# Altium PCB Arduino_DUE_Magic_Pen.PcbDoc (part 2 of 2)
Units mil, origin at the board's own origin, x right, y up, seen from the top; angles counter-clockwise.
Board outline 4416.66 x 2112 mil, 4 copper layers (Top Layer, Mid-Layer 1, Mid-Layer 2, Bottom Layer); 151 components, 188 nets, 610 pads, 191 vias.
Unrouted connection lines stored in the file: 8.
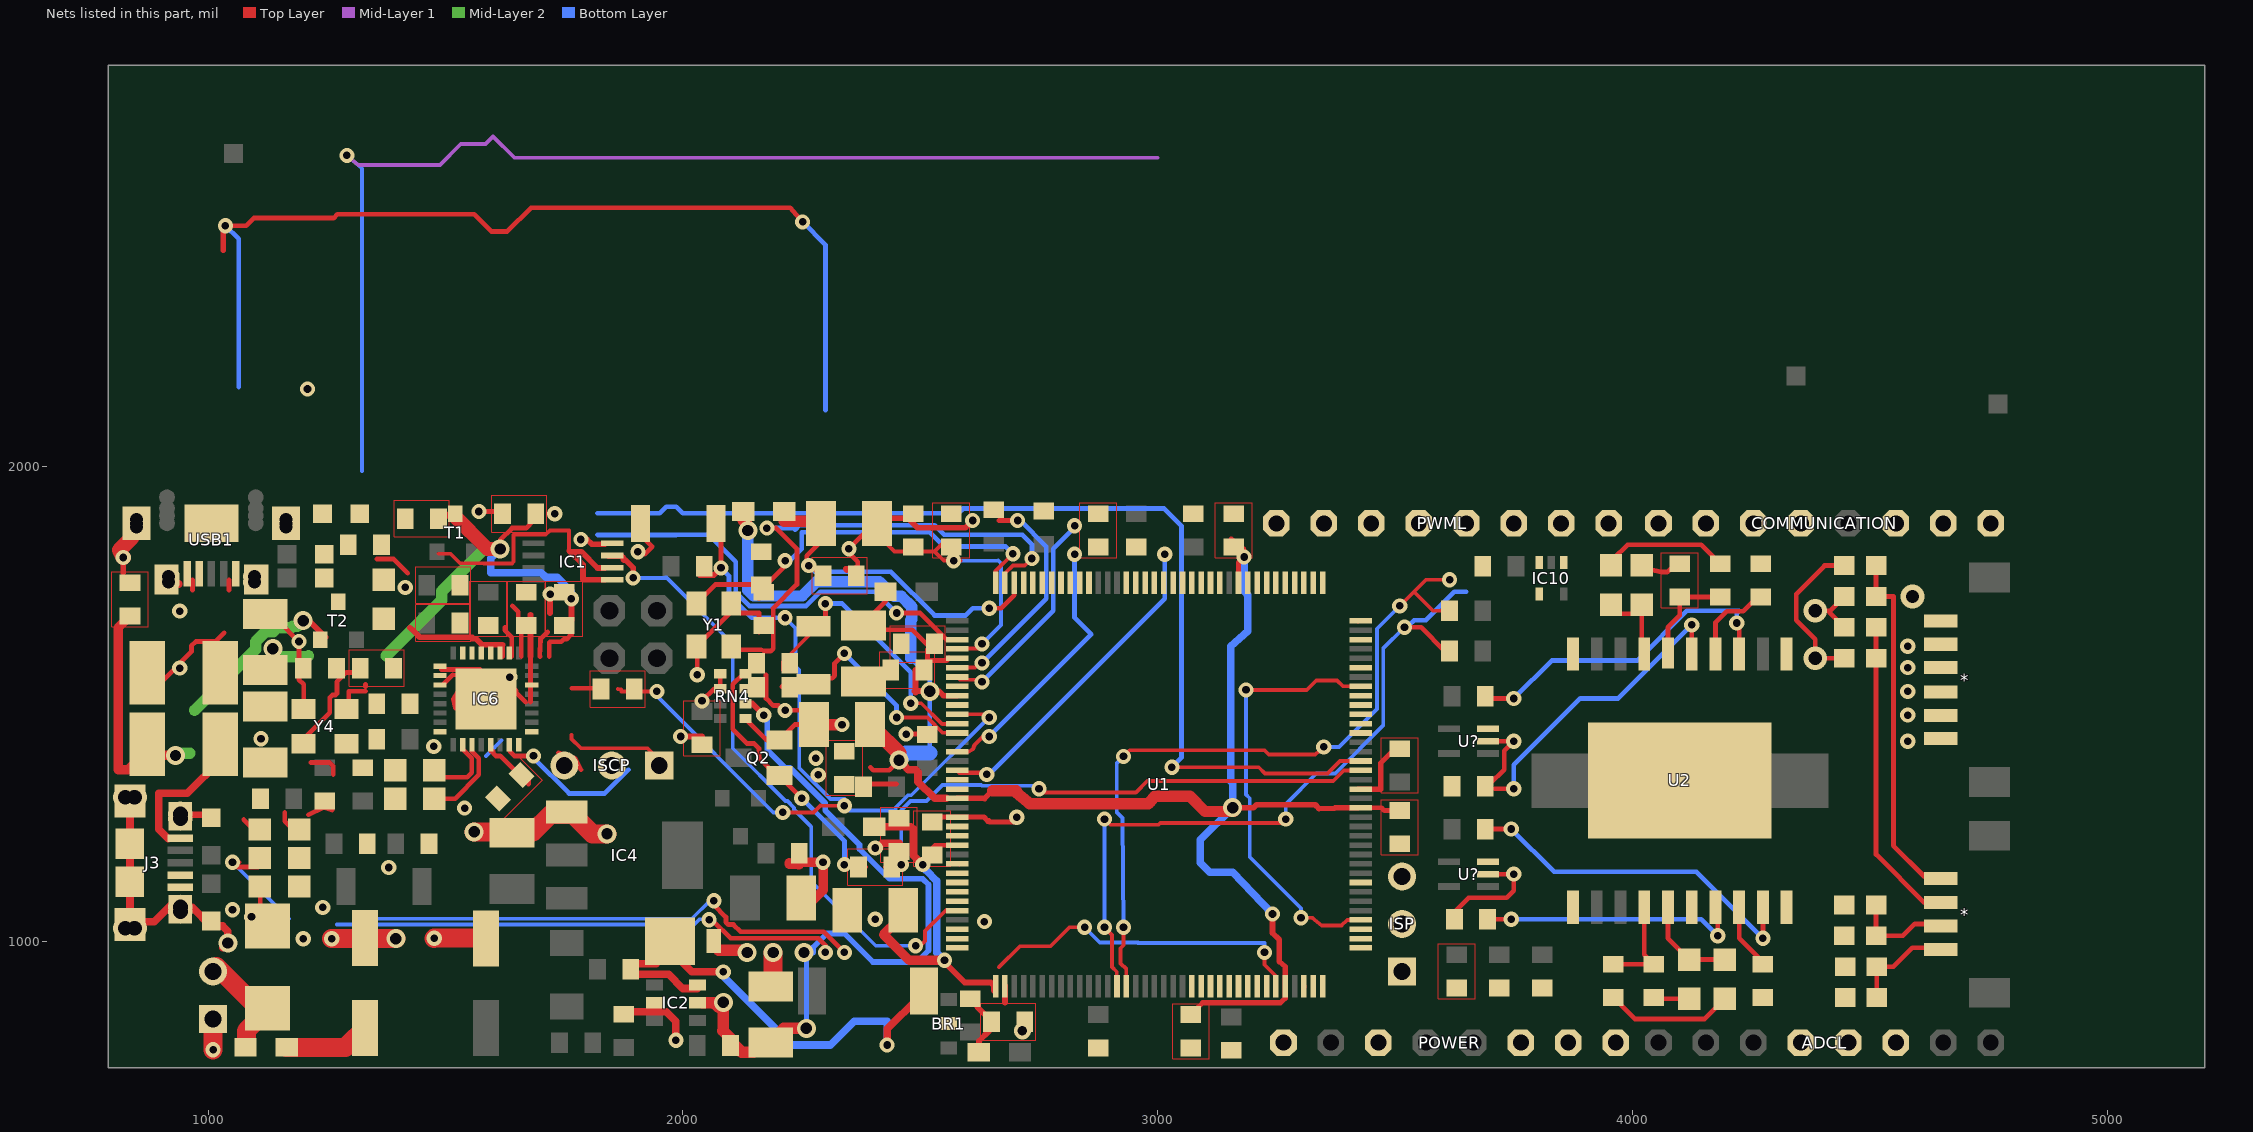
[diagram p4: the nets of this part, all layers, seen from the top]

## Via types
v1: diameter 32, hole 16, Top Layer to Bottom Layer, 160 vias
v2: diameter 40, hole 24, Top Layer to Bottom Layer, 26 vias
v3: diameter 50, hole 28, Top Layer to Bottom Layer, 3 vias
v4: diameter 36, hole 20, Top Layer to Bottom Layer, 1 vias
v5: diameter 32/32/32/32 (per signal layer), hole 16, Top Layer to Bottom Layer, 1 vias

## Nets (pads, with @x,y where several pads share a name; then routed paths per layer and width w, separated by ;. In a path a pad name is that pad's centre, name@x,y a point inside that pad or via, vN(x,y) a via of type N, cw(c..) or ccw(c..) an arc to the next point about the centre after c; other vN are vias at no path point) (continued)
GND: *.6 C1.- C2.- C3.- C4.1 C5.1 C6.1 C7.1 C8.1 C9.1 C10.1 C11.- C12.1 C13.1 C14.1 C15.1 C16.1 C17.1 C18.1 C19.1 C21.1 C22.1 C23.1 C24.1 C25.2 C26.2 C27.- C28.2 C29.- C30.1 C31.1 C32.1 C33.- C34.1 C35.- C36.2 C37.2 C38.2 C39.1 C40.1 C41.- C?.2 COMMUNICATION.6 D1.A D4.P$2 DM2.A DM4.A DM6.A DM8.A IC1.4 IC2.2 IC4.1 IC6.3 IC6.28 IC6.33 IC10.1 IC10.3 J3.P5 J3.P$1 J3.P$2 J3.P$3 J3.P$4 J3.P$5 J3.P$6 J3.P$7 J3.P$8 J3.S1 J3.S2 J3.S3 J3.S4 J3.S5 J3.S6 L.C ON.C P1.1 PC1.- PC2.- POWER.6 POWER.7 Q2.2 R2.2 R7.1 R8.1 R11.2 R18.2 RESET.2 RN4.1 RN4.2 RN4.5 RN4.7 T2.3 U1.12 U1.33 U1.44 U1.46 U1.54 U1.58 U1.74 U1.106 U1.126 U2.P$1 U2.P$10 U2.P$11 U2.P$20 U2.P$21 U?.3 USB1.5 USB1.P$1 USB1.P$2 USB1.P$3 USB1.P$4 USB1.P$5 USB1.P$6 USB1.P$7 USB1.P$8 USB1.P$9 USB1.P$10 USB1.P$11 USB1.S1 USB1.S2 USB1.S3 USB1.S4 Y1.2 Y1.4 Y4.2 Y4.4 Z1.2 Z2.2 Z3.1 Z4.1 Z5.1 | length 4994
  Top Layer w2: 3471.3,1312.01 3494,1312.01 3494.31,1312.31 3504.31,1312.31 3504.61,1312.01 3548.7,1312.01
  Top Layer w8: U1.33@2717.55,1755.2 U1.33@2717.98,1761 ; U1.126@3428.18,1320.16 3429.82,1320.16 U1.126@3429.98,1320
  Top Layer w10: J3.S2@835,1051 J3.P$6@845,1041 ; J3.P$8@928,1083 J3.P$8@941,1083 ; v1(1051,1166) v1@1064.66,1166 ; 1074.66,1256 ON.C@1109.66,1221 ; C27.-@1116,1675.06 1146.94,1675.06 v1(1191,1631) 1191,1551 1201,1541 Y4.4@1201,1496 ; 1520,1491 1516.12,1510.16 IC6.33@1528.44,1528.72 ; IC6.33@1530,1536 1536.76,1530.1 1572.52,1532.53 1643.45,1532.53 1648.98,1527 1648.98,1523 1668.98,1503 ; v1(1570,1905) 1606,1905 R2.2@1620,1891 ; PC2.-@1584.49,1006 PC2.-@1585,1005.49 ; C29.-@1610,1240.06 C29.-@1620.06,1230 ; 1678.82,1503 1678.82,1599.46 ; v1(1905,1820) 1914,1820 1919,1815 1935,1831 RESET.2@1910,1856 ; v1(2030,1561) 2030,1619.3 Y1.2@2028.58,1620.72 2101.42,1693.56 Y1.4@2101.42,1711.28 2121.7,1691 2160,1691 C21.1@2160,1651 ; v1(2040,1506) 2065.75,1531.75 RN4.2@2078.43,1531.75 RN4.1@2078.43,1563.24 ; v2@2130,981 v2(2135,976) ; RN4.5@2131.57,1468.76 2176.93,1423.4 Q2.2@2203.31,1423.4 2235.91,1456 C11.-@2275.94,1456 2245.94,1486 v1(2215,1486) 2210.98,1486 2200.98,1496 2190,1496 2175,1511 2175,1526 ; RN4.7@2131.57,1531.75 2169.25,1531.75 2175,1526 ; C41.-@2170,900.06 C41.-@2190,920.06 ; 2175,1561 2175,1526 ; 2345,1780.02 2341.87,1783.15 2341.87,1785.02 2362.13,1785.02 2367.99,1790.88 2367.99,1799.16 2349.53,1817.62 v1(2349.53,1826.47) C33.-@2384.06,1861 ; C4.1@2380.98,1335.02 2380.98,1331 2450,1331 ; v1(2470,1436) 2505.49,1436 C6.1@2520,1421.49 ; C14.1@2525,1241 2545.1,1261.1 U1.58@2577.78,1261.1 ; DM2.A@4446.54,1596 v3(4385,1596) 4385,1636 4345,1676 4345,1731 4405,1791 DM4.A@4446.54,1791
  Top Layer w11: U1.58@2577.78,1261.1 2633.88,1261.1 2641.98,1253 ; 2643.98,1253 2645.98,1251 v1@2701.98,1251 ; U1.74@2678.18,904.8 U1.74@2678.18,905.8 ; U1.106@3308.1,902.88 U1.106@3308.1,904.8 ; U1.126@3421.98,1320 3429.98,1320 3469.98,1320 3469.98,1374.98 C8.1@3495,1400
  Top Layer w12: 821,1776 v1(821,1808.06) ; 1678.82,1599.46 1678.82,1687.57 ; 1720,1691 v1(1720,1731) ; v1(1785,1846) 1797.98,1846 1807.98,1836 IC1.4@1835,1836 ; v1(1995,1431) C31.1@2040,1431 ; C33.-@2420,1891 2473.38,1891 2493.38,1871 2595,1871 v1(2610,1886) ; 2641.98,1253 2643.98,1253 ; 2678.18,870.2 U1.74@2678.18,905.8
  Top Layer w14: J3.P$2@941,1282 941,1266 999.74,1266 Z3.1@1006,1259.74
  Top Layer w16: J3.S2@835,1051 J3.P$4@835,1311 ; J3.P$6@845,1041 886,1041 J3.P$8@928,1083 ; USB1.P$10@897.69,1749.19 USB1.P$10@937.69,1752.19 ; J3.P$8@941,1078 951,1078 958,1071 966,1071 1005.37,1031.63 1030.37,1031.63 1041,1021 v2(1041,996) v2@1031,986 ; R11.2@1870,851 1965,851 1985,831 v1(1985,791) ; v1@2415,1201 2420,1206 C10.1@2455,1206
  Top Layer w20: 2223.48,1165 2223.97,1164.51 2223.97,1161.98 2241.7,1161.98 2242.7,1160.98 2245.18,1160.98 2240.16,1166 v1(2295,1166) ; C1.-@2249.04,1061 2295,1106.96 v1(2295,1166) ; v1@2290,1166 v1(2295,1166)
  Top Layer w24: D4.P$2@2075,981 v2@2130,981 ; C11.-@2275.94,1456 v1(2335,1456)
  Top Layer w32: v1(821,1808.06) 812.65,1824.03 838.98,1850.36 USB1.P$5@838.98,1856
  Top Layer w40: P1.1@1000,836 1010,826 v1(1010,771) ; v1(1260,1005) v2(1395,1005) ; v1@1475,1005 v1(1476,1006) ; v1@1480,1006 PC2.-@1584.49,1006 ; v2(1560,1230) 1684,1230 1721,1267 1768,1267 1809,1226 v2(1840,1226) ; C41.-@2190,920.06 v2(2190,976)
  other v1: 1200,1005 2405,1046 2405,1196 2702.98,1261 1540,1280 2285,1350 4580,1421 1111,1426 1635,1556 1415,1745
  other v4: 2715,811
JTAG_TCK: U1.28
JTAG_TDI: U1.29
JTAG_TDO: U1.30 | length 12.3
  Top Layer w8: U1.30@2776.6,1755.2 2775.98,1753.82 2775.98,1745 U1.30@2777.98,1745
JTAG_TMS: U1.31 | length 6.8
  Top Layer w8: U1.31@2756.92,1755.2 U1.31@2756.98,1762
L13: IC1.1 IC1.2 RN3C.1 | length 596.9
  Top Layer w8: 1485,1816 1510,1816 1530,1796 1580.4,1796 1580.9,1795.5 1639.5,1795.5 1643,1799 1643,1856 1711.06,1856 1720.06,1865 1760,1865 1760,1836.35 1760.01,1822.31 1760.15,1822.17
  Top Layer w12: IC1.1@1835,1761 1790,1761 1789.31,1761.69 1789.31,1793.01 1760.15,1822.17 1762.32,1820 1786,1820 1820,1786 IC1.2@1835,1786
M1_EN: RM2.1
M1_IN: RM1.1 U?.2@3696,1141 | length 243.2
  Top Layer w10: RM1.1@3617.5,1053.5 3655,1091 3735,1091 3750,1106 v1(3750,1141) U?.2@3696,1141
M2_EN: RM5.1
M2_IN: RM4.1 U?.2@3696,1421 | length 164.7
  Top Layer w10: U?.2@3696,1421 v1(3750,1421) 3730,1401 3730,1361 3700,1331
M_OUT1: R?.2@3960,951 R?.2@4045,951 U2.P$4 | length 218.3
  Top Layer w10: R?.2@3955,951 R?.2@3960,951 R?.2@4045,951 4025,971 U2.P$4@4025,1071
M_OUT2: L1.C L2.A U2.P$5 | length 203.6
  Top Layer w10: U2.P$5@4075,1071 4075,1006 L2.A@4120,961 L1.C@4195,961
M_OUT3: R?.2@4100,1725 R?.2@4185,1725 U2.P$16 | length 194.4
  Top Layer w10: U2.P$16@4075,1626 4075,1661 4100,1686 R?.2@4100,1725 R?.2@4185,1725
M_OUT4: L3.C L4.A U2.P$17 | length 151.7
  Top Layer w10: L4.A@3955,1689.66 4020,1689.66 4020,1610 U2.P$17@4025,1605
MASTER-RESET: C20.1 POWER.3 R23.2 RESET.1 U1.47 | length 1852.7
  Top Layer w8: 1862.5,1531 1869.88,1529.94 ; 1869.88,1526 v1(1945,1526) ; v1(2210,1271) 2275,1271 2289.5,1285.5 2290,1285 v1(2340,1285) ; U1.47@2577.78,1477.64 2634.62,1477.64 2641.26,1471 v1(2645,1471)
  Top Layer w10: RESET.1@2070,1856 2080,1846 v1(2080,1786)
  Top Layer w12: C20.1@2035,1771 2065,1771 v1(2080,1786)
  Bottom Layer w8: v1(1945,1526) 1945,1516 2190,1271 v1(2210,1271) ; v1(2215,1681) 2236.98,1659.02 2236.98,1579.02 2245,1571 2245,1364.8 2310.77,1299.03 2340,1299.03 v1(2340,1285) 2340,1286 2351,1275 2448,1275 2448,1280.97 2474.03,1307 2481,1307 v1(2645,1471)
  Bottom Layer w10: v1(2080,1786) 2097,1769 2097,1729 2145,1681 v1(2215,1681)
MISO: ISP.1 U1.108
MISO2: IC6.17 ISCP.1 | length 246.9
  Top Layer w8: 1765.44,1434.1 1765.44,1425.56 1785,1406 1925,1406 ISCP.1@1975,1356
MOSI: ISP.3 U1.109 | length 1.9
  Top Layer w8: U1.109@3428.18,985.51 U1.109@3429.98,985
MOSI2: IC6.16 ISCP.3 | length 63.8
  Top Layer w10: ISCP.3@1737.88,1396.54 1772.58,1385.31 1785,1361
N$1: IC6.26 R21.1 | length 83.2
  Top Layer w10: 1718.19,1599.46 1718.19,1628.7 1720,1630.51 1743.16,1630.51 1748.65,1636 1755,1636 1765,1646
Net*_1: *.1@4650,1132.18 DM3.A DM4.C | length 743.5
  Top Layer w10: DM4.C@4513.46,1791 DM3.A@4513.46,1726 4550,1726 4550,1201 4615,1136 *.1@4640,1136
Net*_2: *.2@4650,1081 DM1.A DM2.C | length 657.1
  Top Layer w10: DM1.A@4513.46,1661 DM2.C@4513.46,1596 4513.46,1182.54 4615,1081 *.2@4650,1081
Net*_3: *.3@4650,1031.79 DM7.A DM8.C | length 186.9
  Top Layer w10: DM7.A@4513.46,1076 DM8.C@4513.46,1011 4570,1011 4595,1036 *.3@4625,1036
Net*_4: *.4@4650,982.57 DM5.A DM6.C | length 206.6
  Top Layer w10: DM5.A@4515,881 DM6.C@4515,946 4550,946 4590,986 *.4@4640,986
NetBR1_2: BR1.2 C34.2 JR1.2 L3.1 | length 109
  Top Layer w12: JR1.2@2620,861 2640,841 2640,816 C34.2@2638.75,817.25 ; L3.1@2623.38,766 2623.38,789.38 C34.2@2645,811
NetIC6_13: IC6.13 R18.1 | length 125.5
  Top Layer w10: IC6.13@1595,1400 1600.02,1400 1600.02,1396.03 1606.05,1390 1615,1390 1674.75,1330.25 R18.1@1674.75,1344.75
NetJ3_P4: J3.P4
NetL1_A: L1.A R?.1@3960,881 | length 264.1
  Top Layer w10: R?.1@3965,876 4005,836 4152.68,836 L1.A@4195,878.32
NetL2_C: L2.C R?.1@4045,881 | length 87.3
  Top Layer w10: R?.1@4032.68,878.32 L2.C@4120,878.32
NetL3_A: L3.A R?.1@4100,1795 | length 92.1
  Top Layer w10: L3.A@4020,1777.34 4027.55,1784.89 4061.3,1777.34 4073.29,1777.34 4092.61,1796.65 R?.1@4100,1795
NetL4_C: L4.C R?.1@4185,1795 | length 269
  Top Layer w10: L4.C@3960,1805 3990,1835 4145,1835 R?.1@4185,1795 ; R?.1@4170,1786 R?.1@4185,1786
NetL_A: L.A RN3C.2 | length 77.4
  Top Layer w10: 1355,1805 1390,1805 1420,1775
NetON_A: ON.A RN3D.2 | length 63
  Top Layer w10: 1161,1271 1161,1252.34 ON.A@1192.34,1221
NetPOWER_1: POWER.1
NetQ2_1: Q2.1 R3.2 RN4.8 | length 528.9
  Top Layer w10: RN4.8@2131.57,1563.24 2127.69,1563.24 2105,1540.55 2105,1446 2135,1416 2150,1416 2160,1406 2160,1386 2197.4,1348.6 Q2.1@2202.4,1348.6 ; Q2.1@2200,1351 Q2.1@2202.4,1348.6 ; Q2.1@2203.31,1348.6 Q2.1@2202.4,1348.6 ; v1(2250,1301) Q2.1@2202.4,1348.6
  Bottom Layer w10: v1(2250,1301) 2340,1211 v1(2340,1161)
NetR4_1: R4.1 U1.53 | length 688
  Top Layer w10: U1.53@2577.78,1359.53 2582.56,1354.75 2636.25,1354.75 v1(2640,1351)
  Bottom Layer w10: v1(2640,1351) 2645,1351 3015,1721 v1(3015,1815)
NetR5_2: R5.2 U1.43 | length 455.2
  Top Layer w8: U1.43@2577.78,1556.38 2583.56,1550.6 2625.4,1550.6 v1(2630,1546)
  Bottom Layer w10: v1(2630,1546) 2780,1696 2780,1826 v1@2820,1866
  other v1: 2825,1875
NetR6_2: R6.2 U1.42 | length 469.8
  Top Layer w8: U1.42@2576,1576 2615,1576 v1@2620,1581
  Top Layer w10: 2665,1886 v1(2705,1886)
  Bottom Layer w10: v1(2630,1586) 2765,1721 2765,1831 2710,1886 v1(2705,1886)
NetR8_2: R8.2 U1.51 | length 558.4
  Top Layer w8: U1.51@2590,1401 2599,1398 2611,1404 2614,1413 2632,1431 v1(2645,1431)
  Bottom Layer w10: v1(2645,1431) 2860,1646 2825,1681 v1(2825,1815)
NetR14_2: R14.2 TX1.A | length 54.8
  Top Layer w10: 1211,1266 1243,1282 1261,1276
NetR15_2: R15.2 RX1.A | length 68
  Top Layer w10: 1216,1376 1256,1376 1263.32,1368.68 1263.32,1351
NetRM1_2: RM1.2 U2.P$7 | length 561.6
  Top Layer w10: RM1.2@3695,1046 v1(3745,1046) ; U2.P$7@4175,1071 4180,1066 v1(4180,1011)
  Bottom Layer w10: v1(3745,1046) 4145,1046 v1(4180,1011)
NetRM2_2: RM2.2 U2.P$8 | length 121.6
  Top Layer w10: U2.P$8@4225,1071 4225,1006 RM2.2@4265,966
NetRM3_2: RM3.2 U2.P$9 | length 740.3
  Top Layer w10: RM3.2@3695,1236 v1(3745,1236) ; v1(4275,1006) U2.P$9@4275,1071
  Bottom Layer w10: v1(3745,1236) 3835,1146 4135,1146 v1(4275,1006)
NetRM4_2: RM4.2 U2.P$15 | length 648.3
  Top Layer w10: 3709.9,1321.1 3710,1321 v1(3750,1321) ; U2.P$15@4125,1605 v1(4125,1666)
  Bottom Layer w10: v1(3750,1321) 3750,1371 3890,1511 3970,1511 v1(4125,1666)
NetRM5_2: RM5.2 U2.P$14 | length 158.6
  Top Layer w10: U2.P$14@4175,1626 4175,1671 4199,1695 4233.29,1695 4254.29,1716 RM5.2@4270,1716
NetRM6_2: RM6.2 U2.P$13 | length 696.8
  Top Layer w10: RM6.2@3700,1511 v1(3750,1511) ; v1(4220,1670) 4225,1665 U2.P$13@4225,1605
  Bottom Layer w10: v1(3750,1511) 3830,1591 4010,1591 4115,1696 4225,1696 4220,1691 v1(4220,1670)
NetRN3A_2: RN3A.2 RX.A
NetRN3B_2: RN3B.2 TX.A
  other v1: 1241,1071
  other v5: 1380,1155
PIN22: ADCL.4 U1.1
PIN23: ADCL.5 U1.7
PIN24: ADCL.6 U1.8
PIN25: U1.13 | length 4.8
  Top Layer w8: U1.13@3110.98,1760 U1.13@3111.25,1755.2
PIN26: U1.14
PIN27: U1.15 | length 0.3
  Top Layer w8: U1.15@3071.88,1754.9 U1.15@3071.88,1755.2
PIN28: U1.16 | length 2
  Top Layer w8: U1.16@3051.98,1753.2 U1.16@3052.19,1755.2
PIN29: U1.19
PIN30: U1.22
PIN31: U1.26 | length 10.8
  Top Layer w8: U1.26@2854.98,1766 U1.26@2855.34,1755.2
PIN32: U1.32
PIN33: U1.55 | length 4.3
  Top Layer w8: U1.55@2577.78,1320.16 U1.55@2581.98,1321
PIN34: U1.59 | length 4.2
  Top Layer w8: U1.59@2577.78,1241.42 U1.59@2581.98,1241
PIN35: U1.60
PIN36: U1.116 | length 4.3
  Top Layer w8: U1.116@3428.18,1123.31 3428.18,1122.8 U1.116@3431.98,1123
PIN37: U1.63 | length 4.5
  Top Layer w8: U1.63@2577.78,1162.68 U1.63@2581.98,1161
PIN38: U1.64
PIN39: U1.65
PIN40: U1.66
PIN41: U1.67
PIN42: U1.71
PIN43: U1.72 | length 3.8
  Top Layer w8: U1.72@2573.98,985 U1.72@2577.78,985.51
PIN44: U1.101
PIN45: U1.100 | length 0.2
  Top Layer w8: U1.100@3189.99,904.8 U1.100@3189.98,905
PIN46: U1.99
PIN47: U1.98 | length 0.7
  Top Layer w8: U1.98@3149.98,905 U1.98@3150.62,904.8
PIN48: U1.97
PIN49: U1.96 | length 7.9
  Top Layer w8: U1.96@3109.98,897 U1.96@3111.25,904.8
PIN50: U1.95
PIN51: U1.94 | length 1.7
  Top Layer w8: U1.94@3070.18,904.8 U1.94@3071.88,904.8
PWM2: *.2@4650,1625.21 PWML.3 U1.144 | length 6.4
  Top Layer w8: U1.144@3421.98,1673 U1.144@3428.18,1674.49
  other v1: 4580,1621
PWM3: *.3@4650,1576 PWML.4 U1.139 | length 6.3
  Top Layer w8: U1.139@3421.98,1577 U1.139@3428.18,1576.06
  other v1: 4580,1576
PWM4: *.4@4650,1524.82
  other v1: 4580,1526
PWM5: *.5@4650,1475.61 PWML.6 U1.136
  other v1: 4580,1476
PWM6: PWML.7 U1.135 | length 6.2
  Top Layer w8: U1.135@3421.98,1497 U1.135@3428.18,1497.32
PWM7: PWML.8 U1.134 | length 2.5
  Top Layer w8: U1.134@3425.98,1477 3426.62,1477.64 U1.134@3428.18,1477.64
PWM8: U1.133 | length 6.3
  Top Layer w8: U1.133@3421.98,1457 U1.133@3428.18,1457.95
PWM9: U1.132 | length 14.2
  Top Layer w8: U1.132@3413.98,1438 3417.71,1438.27 U1.132@3428.18,1438.27
PWM11: U1.20
PWM12: U1.21
PWM13: IC1.3 U1.68 | length 1310.2
  Top Layer w8: v1(2490,990) 2500,990 2510,1000 2510,1021 U1.68@2555,1066
  Top Layer w12: IC1.3@1843.19,1811 1870.61,1811 1874,1807.61 1874,1804.23 1875.72,1802.51 1879.1,1802.51 1895,1786.61 v1(1895,1765)
  Bottom Layer w8: v1(1895,1765) 1962.78,1765 1964.39,1766.61 2105,1626 2105,1406 2216,1295 2219.94,1295 2234,1280.94 2234,1277 2270,1241 2270,1126 2406,990 v1(2490,990)
  other v1: 2280,1385
RD+: IC6.29 R20.1 | length 114.3
  Top Layer w10: 1640.49,1706 1652.99,1693.5 1652.99,1662.99 1659.14,1656.84 1659.14,1599.46
RD-: IC6.30 R19.1 | length 184.1
  Top Layer w2: 1437.01,1631.3 1440.6,1631.3 1441.3,1632 1458.7,1632 1459.4,1631.3 1552.99,1631.3
  Top Layer w10: 1625,1661 1625,1654.98 1639.45,1640.53 1639.45,1599.46
RESET_CMD: IC6.22 R23.1 | length 74.7
  Top Layer w10: 1765.44,1532.53 1817.86,1532.53 R23.1@1839.48,1527
RX: IC10.4 PWML.1 U1.27
RXD0: COMMUNICATION.2 U1.18
RXD1: U1.5
RXD2: U1.3
RXL: RX.C U1.103 | length 1993.8
  Top Layer w8: 2665.98,945 2709.98,989 2773.98,989 2813.98,1029 v1(2845.98,1029) ; v1(3225,976) 3225,950 3249.04,925.96 U1.103@3249.04,904.8
  Top Layer w10: 1061,1156 1104.66,1156 RX.C@1109.66,1161 ; v1(2065,1085) 2065,1076 2090.44,1050.56 2090.44,1040.03 2095.72,1034.76 2106.24,1034.76 2121.24,1019.76 2296.24,1019.76 v1(2340,976)
  Bottom Layer w8: 1061,1156 1170,1047 ; 1334,1047 2018.56,1047 2056.56,1085 v1(2065,1085) ; v1(2845.98,1029) 2877.98,997 2958.98,997 2957.98,996 3225,996 v1(3225,976)
  other v1: 1051,1066
RXL-U2: IC6.10 RX1.C | length 140.6
  Top Layer w10: RX1.C@1485,1345 1545,1345 1555,1355 1555,1385 1535.79,1404.21 IC6.10@1535.79,1413.54
SCK2: IC6.15 ISCP.2 | length 309.9
  Top Layer w10: IC6.15@1635,1400 1645,1390 v1(1685,1390)
  Bottom Layer w10: v1(1685,1390) 1685,1386 1760,1311 1835,1311 1885,1361
SCL0-3: COMMUNICATION.8 RN5B.2 U1.87 | length 1536
  Top Layer w8: v1(2927.98,1029) 2927.98,991 2921.98,985 2921.98,953 2933.98,941 2933.98,905 U1.87@2934.08,904.8 ; v1(2927.98,1389) 2940.98,1402 3224.98,1402 3233.98,1393 3331.98,1393 v1(3349.98,1409) ; v1(3510,1706) 3540,1736 ; RN5B.2@3610,1696 3580,1696 3540,1736 ; v1(3615,1761) 3565,1761 3540,1736
  Bottom Layer w8: v1(2927.98,1029) 2925.98,1259 2913.98,1271 2913.98,1375 v1(2927.98,1389) ; v1(3349.98,1409) 3381.98,1409 3461.98,1489 3461.98,1657.98 v1(3510,1706)
SCL1: COMMUNICATION.3 U1.70 | length 4
  Top Layer w8: U1.70@2573.98,1025 U1.70@2577.78,1024.88 U1.70@2577.66,1025
  other v1: 2635,1041
SDA0-3: COMMUNICATION.7 RN5A.1 U1.86 | length 1545.4
  Top Layer w8: v1(2887.98,1029) 2903.98,1013 2903.98,945 2913.78,935.2 U1.86@2913.78,908.8 ; v1(2887.98,1257) 2899.98,1245 3001.98,1245 3005.98,1249 3261.98,1249 v1(3269.98,1257) ; U1.86@2914.4,904.8 U1.86@2913.78,908.8 ; U1.86@2915.98,905 U1.86@2913.78,908.8
  Top Layer w10: v1@3525.57,1661 3555,1661 RN5A.1@3605,1611
  Bottom Layer w8: v1(2887.98,1029) v1(2887.98,1257) ; v1(3269.98,1257) 3269.98,1289 3333.98,1353 3373.98,1353 3475,1454.02 3475,1616 v1(3520,1661)
  Bottom Layer w10: v1@3514,1661 v1(3520,1661) ; v1@3530,1666 3540,1676 3565,1676 3625,1736 3650,1736
SDA1: COMMUNICATION.4 U1.9 | length 2.2
  Top Layer w8: U1.9@3189.98,1753 U1.9@3189.99,1755.2
SPCK: ISP.2 U1.110
SS0/PWM10: U1.102 U1.111 | length 6.9
  Top Layer w8: U1.102@3229.36,904.8 U1.102@3229.98,905 ; U1.111@3421.98,1025 U1.111@3428.18,1024.88
SS1/PWM4: PWML.5 U1.112 U1.137 | length 919.9
  Top Layer w8: v1(3185.98,1529) 3313.98,1529 3333.98,1549 3377.98,1549 3389.98,1537 3421.98,1537 U1.137@3428.18,1536.69 ; v1(3301.98,1049) 3325.98,1049 3345.98,1033 3386.98,1033 3399.41,1044.57 U1.112@3428.18,1044.57
  Bottom Layer w8: v1(3185.98,1529) 3185.98,1309 3193.98,1301 3193.98,1177 3301.98,1069 v1(3301.98,1049)
SS3: U1.142
SW: C42.2 D4.P$1 IC2.6 L4.P$1 | length 985.5
  Top Layer w10: D4.P$1@1943.78,952.3 D4.P$1@1972.48,981
  Top Layer w16: C42.2@1890,941 1901.3,952.3 D4.P$1@1943.78,952.3 ; C42.2@1900,930 1970,930 2000,900 IC2.6@2030.28,900 ; D4.P$1@1972.48,981 2018.48,935 v1(2085,935) ; v1(2430,781) 2430,814.78 L4.P$1@2496.22,881
  Bottom Layer w16: v1(2085,935) 2085,926 2230,781 2310.4,781 2360.4,831 2430,831 v1(2430,781)
TX: IC6.8 PWML.2 U1.2 | length 2484.9
  Mid-Layer 1 w8: v1(1291.98,2655) 1315.98,2635 1487.98,2635 1531.98,2679 1583.98,2679 1599.98,2695 1644.98,2650 3000,2650
  Bottom Layer w8: v1(1291.98,2655) 1323.98,2627 1323.98,1990 ; 1585,1390 1590,1395 1618,1423
  other v1: 1475,1410
TXD0: COMMUNICATION.1 U1.17
TXD1: U1.6
TXD2: U1.4
TXL: TX.C U1.107 | length 1153.7
  Top Layer w10: v1(1091,1051) 1109.66,1069.66 TX.C@1109.66,1101 ; v1(2055,1045) 2061,1045 2065,1041 2100.24,1005.76 2285.24,1005.76 2300,991 v1(2300,976)
  Bottom Layer w8: v1(1091,1051) 1107,1035 ; 1271,1035 2023.53,1035 2034.53,1046 2055,1046 2056,1045 v1(2055,1045)
TXL-U2: IC6.11 TX1.C | length 161.8
  Top Layer w10: TX1.C@1485,1300 1519.8,1300 1570,1350.2 1570,1385 IC6.11@1555,1400
UOTGID: U1.129 USB1.4 Z5.2 | length 4310.6
  Top Layer w8: v1(3030,1366) 3212.98,1366 3225.98,1353 3357.98,1353 3384.19,1379.21 U1.129@3428.18,1379.21
  Top Layer w10: 966.59,1739.41 966.59,1761 ; v1(1035.98,2507) 1079.98,2507 1095.98,2523 1263.98,2523 1271.98,2531 1559.98,2531 1595.98,2495 1629.98,2495 1679.98,2545 2225.98,2545 v1(2251.98,2515)
  Top Layer w12: 1031.35,2455 1031.35,2502.37 v1(1035.98,2507)
  Bottom Layer w10: v1(1035.98,2507) 1063.98,2479 1063.98,2167 ; 1820,1901 1950.64,1901 1964.64,1915 1985.36,1915 1999.36,1901 2580,1901 2590,1911 3014,1911 3050,1875 3050,1386 v1(3030,1366) ; v1(2251.98,2515) 2300,2466.98 2300,2119
  other v1: 940,1695 1208.98,2163
UOTGVBOF: R3.1 U1.128 | length 1199.7
  Top Layer w8: R3.1@2425.49,1156 2430.49,1161 v1(2460,1161) ; v1(2750,1321) 2758,1313 2953.98,1313 2977.98,1337 3369.98,1337 3391.98,1359 3419.98,1359 U1.128@3428.18,1359.53
  Top Layer w10: 2355,1156 2385,1156
  Bottom Layer w8: v1(2460,1161) 2460,1276 2479,1295 2512.98,1295 2546.98,1329 2628.06,1329 2630.06,1327 2747.98,1327 2750,1324.98 v1(2750,1321)
USBVCC: C27.+ C35.+ F1.1 R2.1 R21.2 T1.1 | length 969.9
  Top Layer w10: v2(1615,1826) 1615,1845 1640,1870 1670,1870 R2.1@1685,1885
  Top Layer w12: 1765,1676 v1(1765,1721)
  Top Layer w30: T1.1@1517,1897 1588,1826 v2(1615,1826)
  Mid-Layer 2 w10: v2(1136,1616) 1151,1601
  Mid-Layer 2 w24: 1151,1601 1153,1599 1209,1599 1211,1601 ; 1375,1601 1492,1718 1492,1736.75 1581.25,1826 v2(1615,1826)
  Bottom Layer w16: v2(1615,1826) 1595,1806 1595,1776 1701.4,1776 1711.4,1766 1735,1766 1765,1736 v1(1765,1721)
  Bottom Layer w30: v2@1610,1826 v2(1615,1826)
USBVCCU2: C28.1 F2.1 IC6.31 T2.1 | length 1135.8
  Top Layer w10: 1619.77,1599.46 1619.77,1624.21
  Top Layer w12: v2(1200,1675) 1200,1687 1247,1640 ; 1425,1660 1428,1657 1429.11,1657 1442.01,1644.1 1442.01,1642.99 1445,1640 1555.77,1640 1555.77,1637 1563.75,1637 1576.54,1624.21 1619.77,1624.21
  Top Layer w20: C28.1@835,1685 810,1660 810,1361 831,1361 866,1396 871,1391 v2(931,1391)
  Mid-Layer 2 w24: v2(931,1391) 936,1396 961,1396 ; 971,1486 1100,1615 1100,1630.91 1121.09,1652 1137,1652 1145,1660 1174.75,1660 1177.75,1663 1188,1663 v2(1200,1675)
VBG: C25.1 R7.2 U1.40 | length 559.6
  Top Layer w8: 2430,1836 2445.49,1820.51 2530,1820.51 ; C25.1@2565,1838.5 2547.5,1838.5 2530,1821 2550,1801 v1@2585,1801 ; U1.40@2577.78,1615.43 2582.98,1616 2622.98,1616 2630,1623.02 v1(2630,1626)
  Bottom Layer w8: v1(2570,1801) 2662.98,1801 2663.99,1802.01 2670,1796 2670,1666 v1(2630,1626)
VCC: *.1@4650,1674.43
  other v3: 4590,1726
VDDANA: C3.+ C10.2 L1.2 U1.73 | length 742
  Top Layer w8: U1.73@2657.49,896 U1.73@2658.49,904.8
  Top Layer w12: v1@2546.4,959.6 v1(2551,959.6) ; v1@2548.7,957.3 2593.51,912.49 2648.26,912.49 2654.7,906.05 2654.7,896 U1.73@2657.49,896
  Top Layer w16: L1.2@2405,1251 2415,1241 2480,1241 2485,1236 2485,1181 v1(2505,1161)
  Top Layer w20: C3.+@2462.5,1043.5 2452.5,1043.5 2422.5,1013.5 2476.4,959.6 v1(2551,959.6)
  Bottom Layer w16: v1@2504.98,1156 2511.98,1149 2512.46,1149 2535,1126.46 2535,975.6 v1(2551,959.6)
VDDOUT: C11.+ C12.2 C13.2 C14.2 C15.2 C16.2 C17.2 L5.1 U1.10 U1.45 U1.56 U1.61 U1.104 U1.124 | length 3796.5
  Top Layer w8: U1.124@3421.98,1281 U1.124@3428.18,1280.79
  Top Layer w10: 2395,1366 2400.98,1360.02 2434.02,1360.02 v2(2455,1381) ; C14.2@2525,1196 2531.05,1202.05 U1.61@2577.78,1202.05 ; U1.124@3428.18,1280.79 3471.78,1280.79 3477.57,1275 C17.2@3510,1275
  Top Layer w11: C16.2@3080,855 3095,870 3259,870 3268.73,879.73 U1.104@3268.73,904.8 3268.73,946.25 3255.98,957 ; U1.10@3170.3,1755.2 3170.3,1797.32 v1(3181.98,1809) ; 3339.98,1279 3371.98,1279 3373.98,1281 U1.124@3421.98,1281
  Top Layer w11.5: U1.56@2577.78,1300.47 2635.45,1300.47
  Top Layer w12: 2487.5,1526 v2(2520,1526) 2540,1526 2548.99,1517.01 U1.45@2577.78,1517.01 ; 2490,1523.5 C15.2@2490,1571 ; 2635.45,1300.47 2651.98,1317 ; C13.2@3155,1846 C13.2@3181.54,1823.84 ; v2(3157.98,1281) 3201.98,1281 3207.98,1287 3331.98,1287 3339.98,1279 ; C13.2@3181.54,1823.89 3180.73,1822.92 v1(3181.98,1809) ; v1(3241.98,1057) 3241.98,1017 3255.98,1003 3255.98,957
  Top Layer w16: v2@2465,1371 2475,1361 2490,1361 2495,1356 2495,1336 2530,1301 U1.56@2555,1301
  Top Layer w24: L5.1@2126.69,1886 2136.69,1876 v2(2136.69,1865) ; 2651.98,1317 2701.98,1317 2701.98,1313 2725.98,1293 2729.98,1289 2979.98,1289 2983.98,1293 2993.98,1305 3067.98,1305 3099.98,1273 3159.98,1273 v2(3157.98,1281)
  Top Layer w32: C11.+@2405,1446 2455,1396 v2(2455,1381)
  Bottom Layer w10: 2480,1596 2520,1556 2520,1396
  Bottom Layer w16: v1(3181.98,1809) 3181.98,1737 3189.98,1729 3189.98,1653 3153.98,1621 3153.98,1337 3157.98,1333 v2(3157.98,1281) 3089.98,1213 3089.98,1165 3109.98,1145 3157.98,1145 v1(3241.98,1057)
  Bottom Layer w24: v2(2136.69,1865) 2136.69,1738.81 2148.5,1727 2250.95,1727 2280.95,1757 2413.7,1757 2444.7,1726 2460.25,1726 2482,1704.25 2482,1677.75 2480,1675.75 2480,1596
  Bottom Layer w32: v2(2455,1381) 2470,1396 2520,1396
VDDOUTMI: C2.+ C9.2 L2.2 U1.41 | length 301.9
  Top Layer w10: C2.+@2375,1664.12 2426.69,1715.81 L2.2@2426.69,1736 ; C2.+@2410,1646 2400,1656 2482.5,1656 C9.2@2512.5,1626
  Top Layer w11: C9.2@2515,1613.5 2515,1591 2555,1591 U1.41@2560,1596
VDDPLL: C32.2 C33.+ L5.2 U1.34 | length 704.1
  Top Layer w10: C33.+@2290,1841 2260.94,1811.94 2260.94,1795.06 v1(2265,1791) 2270,1791 2290,1771 C32.2@2305,1771 ; v1(2645,1701) 2670,1701 2697.86,1728.86 U1.34@2697.86,1755.2
  Top Layer w24: 2213.31,1884 C33.+@2285,1884
  Bottom Layer w10: v1(2265,1791) 2278,1778 2438,1778 2530,1686 2595.36,1686 2610.36,1701 v1(2645,1701)
VIN: C41.+ IC2.5 L6.1 PC1.+ POWER.8 R10.1 RN4.6 | length 1718.6
  Top Layer w10: C41.+@2148.12,766 2170,787.88 C41.+@2176.88,781
  Top Layer w12: RN4.6@2131.57,1500.25 2145.75,1500.25 v1(2170,1476)
  Top Layer w24: IC2.5@2040,870 2065,870 v2@2075,860 ; v2(2085,871) 2085,811 2084,811 R10.1@2105,790 ; R10.1@2110,780 2124,766 C41.+@2148.12,766 ; C41.+@2176.88,781 2211.88,816 v2(2260,816)
  Top Layer w40: L6.1@1165,776 1288.98,776 PC1.+@1335,822.02
  Bottom Layer w10: v2(2255,976) v2@2255,981 ; v2@2257.5,978.5 2260,976 v2(2260,816)
  Bottom Layer w12: v1@2177.5,1473.5 2177.5,1402.5 2214.8,1365.2 2224.8,1365.2 2299.77,1290.23 2299.77,1275.23 2372.01,1202.99 2372.01,1193.99 2435,1131 2505,1131 2517,1119 2517,980.23 2492.77,956 2400,956 2340,1016 2303.23,1016 2274,986.77 2274,976 v2(2255,976)
VIN+: D1.C DM1.C DM3.C DM5.C DM7.C L6.2 P1.2 U2.P$6 | length 344.5
  Top Layer w10: D1.C@1097.5,866 D1.C@1110,866 ; v3(4385,1696) 4416.54,1696 ; DM1.C@4446.54,1661 4416.54,1691 4416.54,1696 ; DM3.C@4446.54,1726 4416.54,1696
  Top Layer w40: P1.2@1017.5,946 D1.C@1097.5,866 ; L6.2@1080,781 1080,811 1110,841 D1.C@1110,866
VUCAP: C38.1 IC6.27 | length 58.1
  Top Layer w10: 1698.51,1599.46 1700.05,1637.22 1715,1651
XIN: C22.2 U1.36 Y1.1 | length 879.4
  Top Layer w8: U1.36@2658.49,1755.2 2658.49,1779.49 v1(2695,1816)
  Top Layer w10: Y1.1@2028.58,1711.28 2068.3,1751 C22.2@2160,1751 ; 2160,1721 C22.2@2160,1751 ; v1(2215,1801) 2215,1791 2175,1751 C22.2@2160,1751
  Bottom Layer w10: v1(2215,1801) 2225,1801 2250,1826 2250,1861 2520,1861 2550,1831 2680,1831 v1(2695,1816)
XIN32: C24.2 U1.48 Y2.P$2 | length 616.1
  Top Layer w8: 2210,1571 2210,1588.5 2277.5,1656 Y2.P$2@2275,1656 ; v1(2480,1501) 2501.98,1501 2545.98,1457 2573.98,1457 U1.48@2577.78,1457.95
  Top Layer w10: Y2.P$2@2275,1656 2300,1681 2300,1701 2310,1711 v1(2300,1711)
  Bottom Layer w10: v1(2300,1711) 2335,1711 2480,1566 v1(2480,1501)
XOUT: C21.2 U1.35 Y1.3 | length 1085.2
  Top Layer w8: U1.35@2678.18,1755.2 2677.98,1761 2677.98,1773.98 2695,1791 2720,1791 v1(2735,1806)
  Top Layer w10: Y1.3@2100,1626 2112.5,1613.5 2165,1613.5 ; 2170,1611 2185,1611 2190,1616 2190,1701 ; v1(2176.69,1870.03) 2195.97,1870.03 2240,1826 2240,1751.36 2189.82,1701.18
  Bottom Layer w10: 2195,1870.03 2232.77,1870.03 2236,1866.8 2245.2,1876 2530,1876 2550,1856 2715,1856 2735,1836 v1(2735,1806)
XOUT32: C23.2 U1.49 Y2.P$1 | length 498.9
  Top Layer w8: v1(2450,1471) 2515,1471 2547,1439 2573.98,1439 2573.98,1438.27 U1.49@2577.78,1438.27
  Top Layer w10: 2207.99,1536 2212.99,1541 Y2.P$1@2275,1541 2287.65,1553.65 2314.16,1553.65 2319.43,1558.92 2319.43,1585.43 v1(2340,1606)
  Bottom Layer w10: v1(2340,1606) 2450,1496 v1(2450,1471)
XT1: C39.2 IC6.1 R9.1 Y4.1 | length 314.6
  Top Layer w10: Y4.1@1191.58,1416.58 1256,1481 1256,1512.83 1261.68,1518.51 1268.51,1518.51 1271,1521 1271,1546 1291,1566 1321,1566 R9.1@1326.9,1571.9 ; 1490.9,1571.9 1572.52,1571.9
XT2: C40.2 IC6.2 R9.2 Y4.3 | length 152.1
  Top Layer w10: Y4.3@1296,1496 1296,1526 1331,1526 ; 1331,1536 1331,1541 ; 1495,1541 1515,1561 1554.15,1555.5 1555.33,1553.92 1567.52,1552.21
XUSB: C26.1 F1.2 U1.39 USB1.1 | length 1134.3
  Top Layer w10: F1.2@857.46,1551 906,1551 964.6,1609.6 964.6,1621.66 973.94,1631 1014.95,1631 1033.36,1649.41 ; 1043.36,1739.41 1043.36,1761 ; v1(2450,1691) 2500,1691 U1.39@2555,1636
  Bottom Layer w10: 1820,1856 1820.5,1855.5 1985.36,1855.5 1985.86,1856 2053.99,1856 2111,1798.99 2111,1734.8 2139.8,1706 2259.64,1706 2289.64,1736 2405,1736 v1(2450,1691)
  other v1: 940,1575 1730,1900
XVCC: F2.2 J3.P1 | length 262.3
  Top Layer w16: J3.P1@916,1216 896,1236 896,1311 956,1311 F2.2@1026,1381
pads on no net: *.5@4752.36,891.04 *.5@4752.36,1221.75 *.7 FID1.P$1 FID3.P$1 FID4.P$1 IC6.5 IC6.6 IC6.7 IC6.12 IC6.14 IC6.24 IC6.25 U1.50 U1.69 U1.93 U1.117 U1.131 U1.138 U1.141 U1.143 U2.P$3 U2.P$18 U2.P$22 U2.P$23 U?.1 USB1.
copper on no net: | length 468.3
  Top Layer w10: 1192.34,1101 1222.34,1071 1241,1071 ; 1192.34,1161 1222.34,1191 1231,1191 1246,1206 1245.51,1206.49 1245.51,1226 ; 1415,1169.51 1415,1175 1460,1220
  Bottom Layer w10: 1241,1071 1241,1096 1301,1156 1424,1156 1415,1165

## Keep-outs
Keep-Out Layer:
  lines w10: 807.98,2799.63 cw(c847.35,2799.63) 847.35,2839 4647.98,2839 4707.98,2779 4707.98,2329 4807.98,2229 4807.98,778.37 cw(c4768.61,778.37) 4768.61,739 ; 812.98,1936 4807.98,1936 ; 885,950 947.98,887.02 947.98,778.37 ccw(c987.35,778.37) 987.35,739 ; 987.35,735 4775,735

## Other copper
Mid-Layer 1:
  text "This is actually a plane layer..." at 1795,546 h60
Mid-Layer 2:
  text "This is actually a plane layer..." at 1795,546 h60

## Silkscreen, mask and mechanical layers (free items; w line width, h text height)
Top Overlay:
  circle w12: c1647.98,1761 r7.07
  lines w8: 1755.98,2421 1789.98,2387 1819.98,2387 1819.98,2395 1791.98,2395 1763.98,2423 1763.98,2455 1755.98,2455 1755.98,2421
  lines w12: 1962.98,2549 1997.98,2514 2407.98,2514 ; 2627.98,2514 3067.98,2514 3107.98,2554 ; 2784.98,1003 2812.98,1031 2932.98,1031 ; 3212.98,2399 3257.98,2354 3307.98,2354 ; 3615.98,1031 4028.98,1031 4051.98,1008 ; 4092.98,2354 4162.98,2354 4207.98,2399 ; 4302.98,1644 4302.98,1184 4342.98,1144 ; 4302.98,2059 4302.98,2599 4342.98,2639 ; 4507.98,964 4507.98,944 4607.98,944 4607.98,964 ; 4507.98,2789 4507.98,2814 4607.98,2814 4607.98,2789
  lines w16: 3182.98,2539 3207.98,2564 ; 3182.98,2539 3207.98,2539 ; 3182.98,2539 3207.98,2589 3232.98,2539 ; 3207.98,2539 3232.98,2539 ; 3207.98,2539 3207.98,2564 ; 3207.98,2564 3232.98,2539 ; 3282.98,2589 3307.98,2564 ; 3282.98,2589 3307.98,2539 3332.98,2589 ; 3282.98,2589 3307.98,2589 ; 3307.98,2564 3307.98,2589 ; 3307.98,2564 3332.98,2589 ; 3307.98,2589 3332.98,2589
  text "M.Banzi" at 787.98,2839 h45 r180
  text "5V" at 4487.98,2824 h44 r180
  text "D.Cuartielles" at 787.98,2759 h45 r180
  text "T.Igoe" at 787.98,2679 h45 r180
  text "9" at 2382.98,2614 h56 r90
  text "8" at 2482.98,2614 h56 r90
  text "7" at 2632.98,2614 h56 r90
  text "6" at 2732.98,2614 h56 r90
  text "5" at 2832.98,2614 h56 r90
  text "4" at 2932.98,2614 h56 r90
  text "3" at 3032.98,2614 h56 r90
  text "2" at 3132.98,2614 h56 r90
  text "1" at 3232.98,2614 h56 r90
  text "0" at 3332.98,2614 h56 r90
  text "22" at 4357.98,2614 h56
  text "G.Martino" at 787.98,2599 h45 r180
  text "14" at 3532.98,2579 h56 r90
  text "15" at 3632.98,2579 h56 r90
  text "16" at 3732.98,2579 h56 r90
  text "17" at 3832.98,2579 h56 r90
  text "18" at 3932.98,2579 h56 r90
  text "19" at 4032.98,2579 h56 r90
  text "20" at 4132.98,2579 h56 r90
  text "21" at 4232.98,2579 h56 r90
  text "13" at 1982.98,2564 h56 r90
  text "12" at 2082.98,2564 h56 r90
  text "11" at 2182.98,2564 h56 r90
  text "10" at 2282.98,2564 h56 r90
  text "GND" at 1887.23,2529.48 h56 r90
  text "D.Mellis" at 787.98,2519 h45 r180
  text "24" at 4357.98,2514 h56
  text "SCL1" at 1589.81,2482.48 h56 r90
  text "SDA1" at 1681.81,2482.48 h56 r90
  text "AREF" at 1781.81,2482.48 h56 r90
  text "PWM" at 2432.98,2481 h66
  text "26" at 4357.98,2414 h56
  text "TX" at 3232.98,2409 h56 r90
  text "RX" at 3332.98,2409 h56 r90
  text "TX0" at 3532.98,2409 h56 r90
  text "RX0" at 3632.98,2409 h56 r90
  text "TX1" at 3732.98,2409 h56 r90
  text "RX1" at 3832.98,2409 h56 r90
  text "TX2" at 3932.98,2409 h56 r90
  text "RX3" at 4032.98,2409 h56 r90
  text "SDA" at 4132.98,2409 h56 r90
  text "SCL" at 4232.98,2409 h56 r90
  text "28" at 4357.98,2314 h56
  text "30" at 4357.98,2214 h56
  text "31" at 4682.98,2214 h56
  text "32" at 4357.98,2114 h56
  text "33" at 4682.98,2114 h56
  text "34" at 4357.98,2014 h56
  text "35" at 4682.98,2014 h56
  text "1" at 3267.65,1968.52 h50 r180
  text "36" at 4357.98,1914 h56
  text "37" at 4682.98,1914 h56
  text "38" at 4357.98,1814 h56
  text "39" at 4682.98,1814 h56
  text "MADE IN" at 4887.98,1765 h60
  text "40" at 4357.98,1714 h56
  text "41" at 4682.98,1714 h56
  text "ITALY" at 4954.98,1693 h60
  text "DIGITAL" at 4332.98,1664 h66 r90
  text "42" at 4357.98,1614 h56
  text "43" at 4657.98,1614 h56
  text "44" at 4357.98,1514 h56
  text "45" at 4657.98,1514 h56
  text "46" at 4357.98,1414 h56
  text "47" at 4682.98,1414 h56
  text "48" at 4357.98,1314 h56
  text "49" at 4682.98,1314 h56
  text "Arduino" at 3165.98,1223 h80
  text "50" at 4357.98,1214 h56
  text "51" at 4682.98,1214 h56
  text "52" at 4357.98,1114 h56
  text "53" at 4682.98,1114 h56
  text "DUE" at 3289.98,1113 h90
  text "www.arduino.cc" at 3594.98,1088 h65
  text "ANALOG   IN" at 2958.98,993 h66
  text "GND" at 4647.98,939 h56
  text "0" at 2837.98,924 h56 r90
  text "1" at 2927.98,924 h56 r90
  text "2" at 3037.98,924 h56 r90
  text "3" at 3137.98,924 h56 r90
  text "4" at 3237.98,924 h56 r90
  text "5" at 3332.98,924 h56 r90
  text "6" at 3432.98,924 h56 r90
  text "7" at 3537.98,924 h56 r90
  text "8" at 3737.98,924 h56 r90
  text "9" at 3837.98,924 h56 r90
  text "10" at 3937.98,924 h56 r90
  text "11" at 4029.98,924 h56 r90
  text "5V" at 2267.46,907.17 h56
  text "GND" at 2387.46,907.17 h56
  text "VIN" at 2559.46,907.17 h56
  text "IOREF" at 2036.81,906.48 h56 r90
  text "RESET" at 2136.81,906.48 h56 r90
  text "3V3" at 2236.81,906.48 h56 r90
  text "DAC0" at 4125.98,900 h40 r90
  text "DAC1" at 4225.98,900 h40 r90
  text "CANRX" at 4325.98,900 h40 r90
  text "CANTX" at 4420.98,900 h40 r90
Mechanical 2:
  text "USBVCCU2" at 947.98,1571 h40
  text "PC2" at 3695.98,1423 h40
  text "PC1" at 1697.98,941 h40

## Text inside footprints (layer, text, board x,y; h text height)
IC4: Top Overlay "2" at 1706.63,1231.81 h32 r270; Top Overlay "1" at 1707,1316.93 h32 r270; Top Overlay "4" at 1977,1106 h32 r270; Top Overlay "3" at 1707,1140.81 h32 r270
IC6: Top Overlay "1" at 1462.95,1588.74 h32
J3: Top Layer "DELETE SOLDER PADS" at 685,865 h32 r90; Top Overlay "PCB" at 785,975 h40 r270
USB1: Top Layer "DELETE SOLDER PADS" at 756.5,2030 h32; Top Overlay "PCB" at 788,1942.99 h40 r180